# Altium PCB ES_Class6C_2L.PcbDoc
Units mm, origin at the board's own origin, x right, y up, seen from the top; angles counter-clockwise.
Board outline 56 x 55 mm, 2 copper layers (Top Layer, Bottom Layer), stack 1.586 mm thick; 71 components, 24 nets, 188 pads, 106 vias.
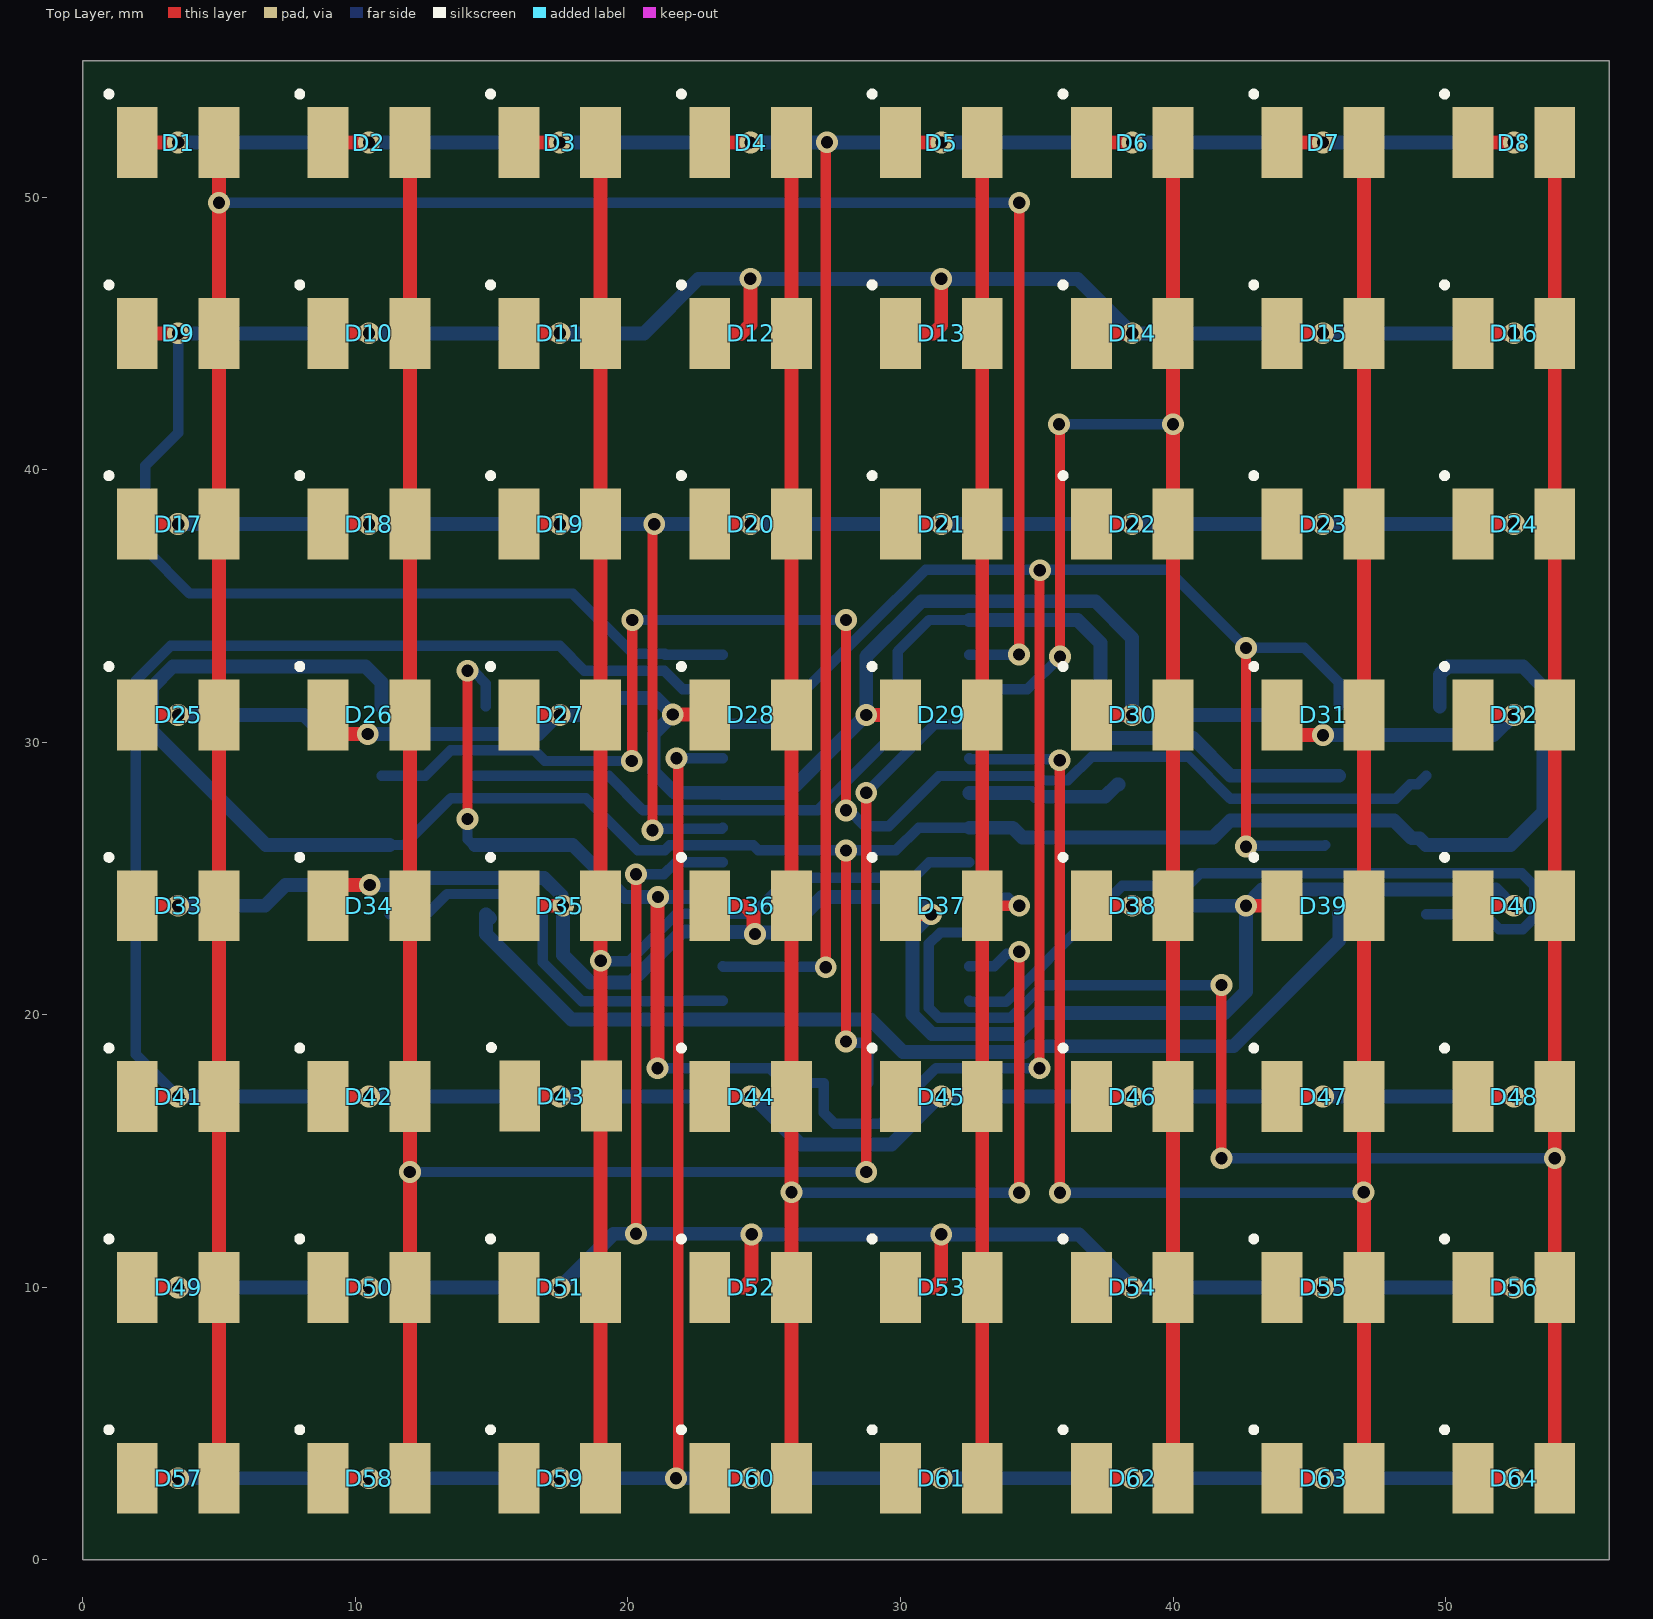
[diagram p0: Top Layer view]
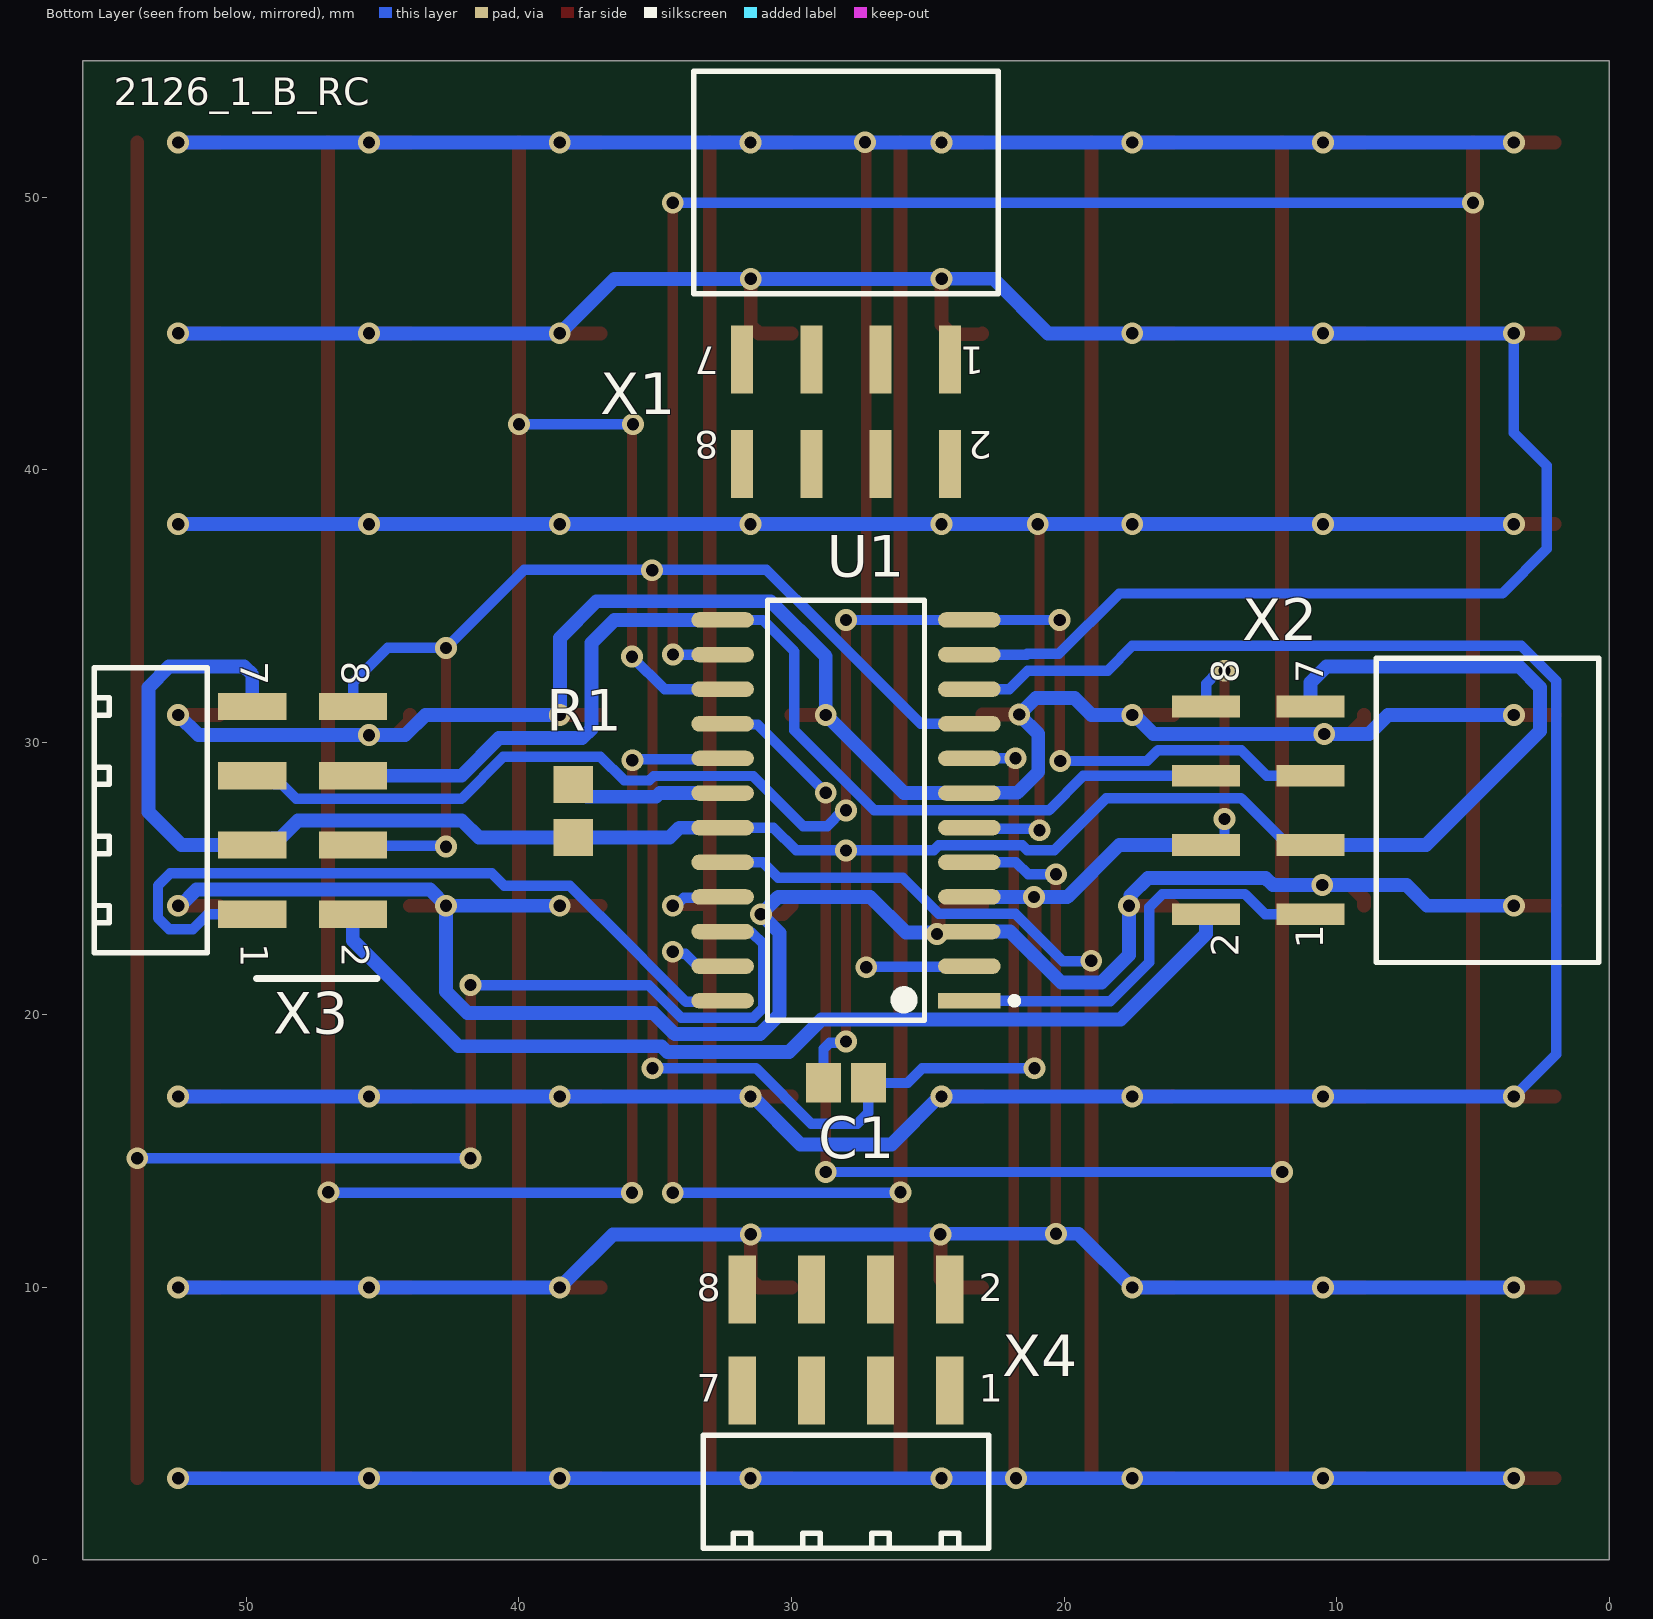
[diagram p1: Bottom Layer view, seen from below]
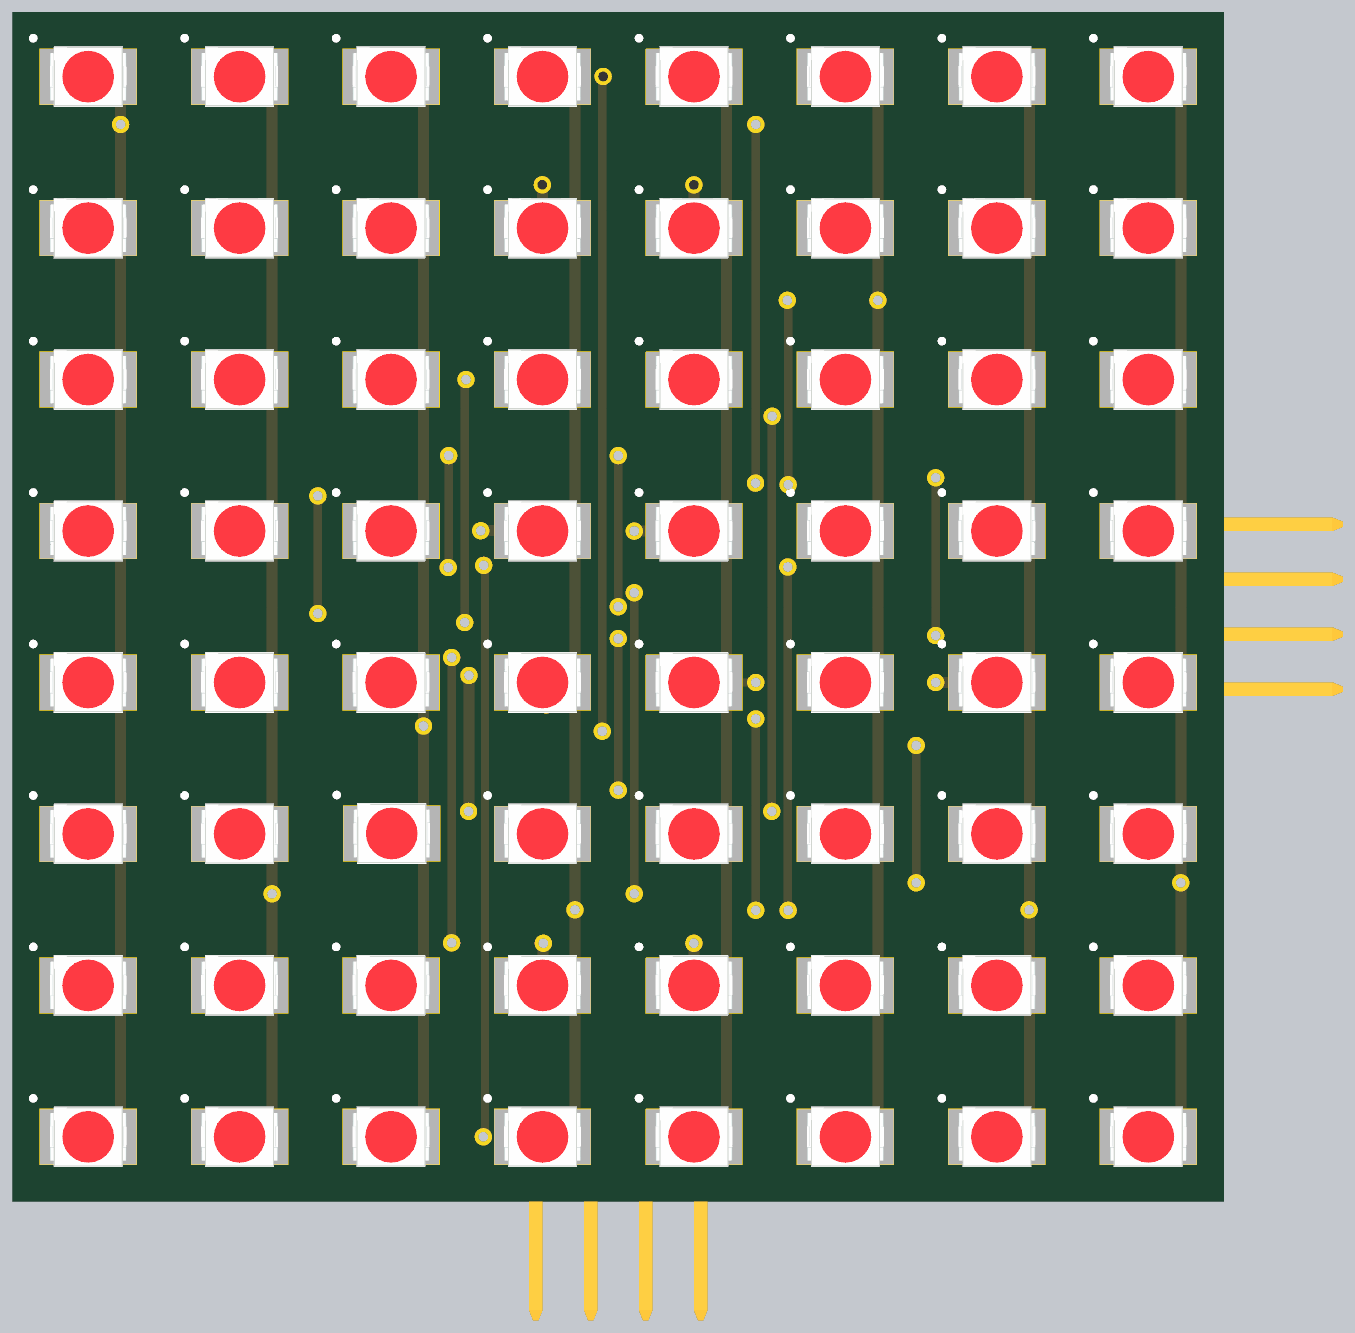
[diagram p2: 3D render of the assembled board from above, using the file's embedded part models]
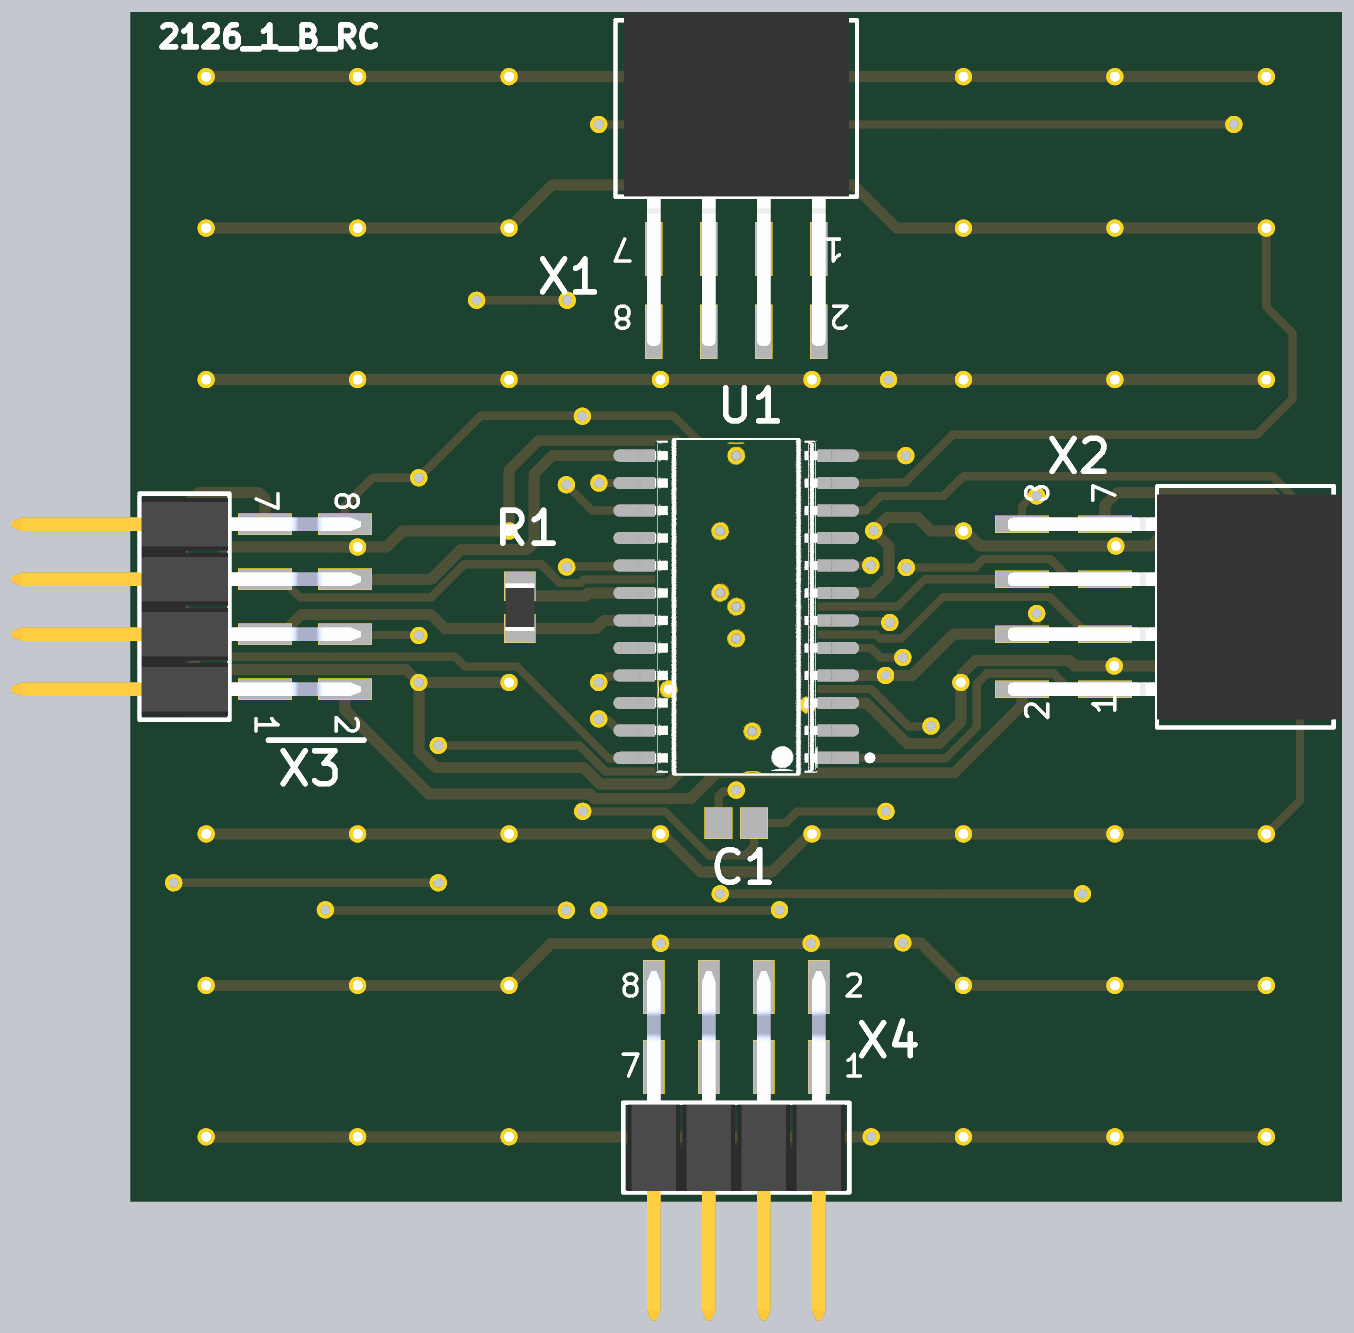
[diagram p3: 3D render of the assembled board from below, using the file's embedded part models]

## Layer stack, top to bottom
Top Solder: solder mask 0.0102, Solder Resist, Dk 3.5
Top Layer: signal copper 0.018
Dielectric1: core 1.55, FR-4, Dk 4.8
Bottom Layer: signal copper 0.018
Bottom Solder: solder mask 0.0102, Solder Resist, Dk 3.5

## Board outline
0,0 0,55 56,55 56,0

## Design rules (kind name [scope] priority, off if disabled: settings)
BoardOutlineClearance [All] p1: gap=0.25 ignorepadtopadclearanceinfootprint=FALSE except(0: Arc-SplitContinuation Track-SplitContinuation SMDPad-SplitContinuation THPad-SplitContinuation Via-SplitContinuation Fill-SplitContinuation Poly-SplitContinuation Region-SplitContinuation Text-SplitContinuation)
Clearance Clearance-xPP-xTP-xTT [All] p1: gap=0.15 ignorepadtopadclearanceinfootprint=FALSE except(0: Arc-Hole Track-Hole SMDPad-Hole THPad-Hole Via-Hole Fill-Hole Poly-Hole Region-Hole Text-Hole)
ComponentClearance [All] p1: gap=0.25 collisioncheckmode=3 verticalgap=0.25 showdistances=FALSE
DiffPairsRouting [All] p1: maxlimit=0.25 minlimit=0.25 mostfreqgap=0.25 toplayer_minwidth=0.381 toplayer_maxwidth=0.381 toplayer_prefwidth=0.381 bottomlayer_minwidth=0.381 bottomlayer_maxwidth=0.381 bottomlayer_prefwidth=0.381 maxuncoupledlength=12.5
Height [All] p1: minheight=0 maxheight=25 prefheight=12.5
HoleSize HoleSize-PTH [All] p1: absolutevalues=TRUE maxlimit=10 minlimit=0.25 maxpercent=80.000 minpercent=20.000
HoleToHoleClearance [All] p1: gap=0.35 allowstackedmicrovias=TRUE
MinimumAnnularRing "Minimum IAR  >0.45mm" [((ObjectKind = 'Pad') OR (ObjectKind = 'Via')) And (Layer = 'MultiLayer') And (HoleDiameter > AsMM(0.45))] p1: minimumring=0.175 // minimum inner annular ring for pads > 0.45mm finished hole size
MinimumAnnularRing "Minimum IAR <=0.45mm" [((ObjectKind = 'Pad') OR (ObjectKind = 'Via')) And (Layer = 'MultiLayer') And (HoleDiameter <= AsMM(0.45))] p2: minimumring=0.175 // minimum inner annular ring for pads <= 0.45mm finished hole size
MinimumSolderMaskSliver [All] p1: minsoldermaskwidth=0.08
PasteMaskExpansion [All] p1: expansion=-0.025
PlaneClearance PlaneClearance-IPI [All] p1: clearance=0.25
PlaneConnect [All] p1: planeconnectstyle=Relief reliefexpansion=0.175 reliefentries=4 reliefconductorwidth=0.2 reliefairgap=0.2
PolygonConnect PolygonConnect-xTW [All] p1: connectstyle=Relief reliefconductorwidth=0.2 reliefentries=4 polygonreliefangle="90 Angle" airgapwidth=0.2
RoomDefinition 2126_A_MatrixBoard_AffichageMatricielNomEtudiant [InComponentClass('2126_A_MatrixBoard_AffichageMatricielNomEtudiant')] p1: confinementstyle=ConfineIn formatcopy=TRUE lockcomponents=FALSE outline -250,-211.955 743.585,-211.955 743.585,443.238 -250,443.238
RoutingCorners [All] p1: cornerstyle=45-Degree minsetback=2.5 maxsetback=2.5
RoutingVias RoutingViasES [All] p1: holewidth=0.3 width=0.65 viastyle="Through Hole" minholewidth=0.25 minwidth=0.61 maxholewidth=0.45 maxwidth=0.8 // finishet hole size <= 0.45mm
SilkToSilkClearance [All] p1: silktosilkclearance=0.2
SilkToSolderMaskClearance SilkscreenOverComponentPads [IsPad] p1: minsilkscreentomaskgap=0.2 clearancetoexposedcopper=TRUE
SolderMaskExpansion [All] p1: expansion=0 istentingtop=FALSE
UnRoutedNet [All] p1: checkbadconnections=TRUE
Width Width-xTW [All] p1: maxlimit=0.508 minlimit=0.254 preferedwidth=0.381 minimp=50.000000 maximp=50.000000 favimp=50.000000
17 further rules are at their usual default settings.

## Components (designator, comment, footprint, x,y, rotation, side; value= is the part's Value field where it differs from the comment)
C1 "100nF" CAPC2013X145X48NL20T23 28,17.5 r0 bottom
D1 "RED" SODFL350X210-2N 3.5,52 r0 top
D2 "RED" SODFL350X210-2N 10.5,52 r0 top
D3 "RED" SODFL350X210-2N 17.5,52 r0 top
D4 "RED" SODFL350X210-2N 24.5,52 r0 top
D5 "RED" SODFL350X210-2N 31.5,52 r0 top
D6 "RED" SODFL350X210-2N 38.5,52 r0 top
D7 "RED" SODFL350X210-2N 45.5,52 r0 top
D8 "RED" SODFL350X210-2N 52.5,52 r0 top
D9 "RED" SODFL350X210-2N 3.5,45 r0 top
D10 "RED" SODFL350X210-2N 10.5,45 r0 top
D11 "RED" SODFL350X210-2N 17.5,45 r0 top
D12 "RED" SODFL350X210-2N 24.5,45 r0 top
D13 "RED" SODFL350X210-2N 31.5,45 r0 top
D14 "RED" SODFL350X210-2N 38.5,45 r0 top
D15 "RED" SODFL350X210-2N 45.5,45 r0 top
D16 "RED" SODFL350X210-2N 52.5,45 r0 top
D17 "RED" SODFL350X210-2N 3.5,38 r0 top
D18 "RED" SODFL350X210-2N 10.5,38 r0 top
D19 "RED" SODFL350X210-2N 17.5,38 r0 top
D20 "RED" SODFL350X210-2N 24.5,38 r0 top
D21 "RED" SODFL350X210-2N 31.5,38 r0 top
D22 "RED" SODFL350X210-2N 38.5,38 r0 top
D23 "RED" SODFL350X210-2N 45.5,38 r0 top
D24 "RED" SODFL350X210-2N 52.5,38 r0 top
D25 "RED" SODFL350X210-2N 3.5,31 r0 top
D26 "RED" SODFL350X210-2N 10.5,31 r0 top
D27 "RED" SODFL350X210-2N 17.5,31 r0 top
D28 "RED" SODFL350X210-2N 24.5,31 r0 top
D29 "RED" SODFL350X210-2N 31.5,31 r0 top
D30 "RED" SODFL350X210-2N 38.5,31 r0 top
D31 "RED" SODFL350X210-2N 45.5,31 r0 top
D32 "RED" SODFL350X210-2N 52.5,31 r0 top
D33 "RED" SODFL350X210-2N 3.5,24 r0 top
D34 "RED" SODFL350X210-2N 10.5,24 r0 top
D35 "RED" SODFL350X210-2N 17.5,24 r0 top
D36 "RED" SODFL350X210-2N 24.5,24 r0 top
D37 "RED" SODFL350X210-2N 31.5,24 r0 top
D38 "RED" SODFL350X210-2N 38.5,24 r0 top
D39 "RED" SODFL350X210-2N 45.5,24 r0 top
D40 "RED" SODFL350X210-2N 52.5,24 r0 top
D41 "RED" SODFL350X210-2N 3.5,17 r0 top
D42 "RED" SODFL350X210-2N 10.5,17 r0 top
D43 "RED" SODFL350X210-2N 17.53,17.021 r0 top
D44 "RED" SODFL350X210-2N 24.5,17 r0 top
D45 "RED" SODFL350X210-2N 31.5,17 r0 top
D46 "RED" SODFL350X210-2N 38.5,17 r0 top
D47 "RED" SODFL350X210-2N 45.5,17 r0 top
D48 "RED" SODFL350X210-2N 52.5,17 r0 top
D49 "RED" SODFL350X210-2N 3.5,10 r0 top
D50 "RED" SODFL350X210-2N 10.5,10 r0 top
D51 "RED" SODFL350X210-2N 17.5,10 r0 top
D52 "RED" SODFL350X210-2N 24.5,10 r0 top
D53 "RED" SODFL350X210-2N 31.5,10 r0 top
D54 "RED" SODFL350X210-2N 38.5,10 r0 top
D55 "RED" SODFL350X210-2N 45.5,10 r0 top
D56 "RED" SODFL350X210-2N 52.5,10 r0 top
D57 "RED" SODFL350X210-2N 3.5,3 r0 top
D58 "RED" SODFL350X210-2N 10.5,3 r0 top
D59 "RED" SODFL350X210-2N 17.5,3 r0 top
D60 "RED" SODFL350X210-2N 24.5,3 r0 top
D61 "RED" SODFL350X210-2N 31.5,3 r0 top
D62 "RED" SODFL350X210-2N 38.5,3 r0 top
D63 "RED" SODFL350X210-2N 45.5,3 r0 top
D64 "RED" SODFL350X210-2N 52.5,3 r0 top
R1 "43k" RESC2013X70X40ML20T20 38,27.475 r90 bottom value=10k
U1 "MAX7221CWG+" FP-W24-1-IPC_B 28,27.5 r0 bottom
X1 "610108249221" 610108249221 28,50.8 r0 bottom
X2 "610108249221" 610108249221 4.2,27.5 r90 bottom
X3 "M20-7920442R" 610108249121 53.5,27.5 r270 bottom
X4 "M20-7920442R" 610108249121 28,2.5 r180 bottom

## Footprints (in the part's own frame and the unit in brackets; to place one, negate y for a bottom-side part, rotate by r counter-clockwise, add the part's x,y. Pads: shape width x height; smd on the part's side, far side on the other; paste and mask are expansions set on the pad)
610108249121 [mm] "Pin Header, pitch 2.54 mm, SMD, Angled, dual row, 8p"
  rect 1x2.5 smd: 1(3.81,3.72) 2(3.81,7.42) 3(1.27,3.72) 4(1.27,7.42) 5(-1.27,3.72) 6(-1.27,7.42) 7(-3.81,3.72) 8(-3.81,7.42)
  silkscreen extent -5.23,-2.07 5.23,2.07, body extent -5.08,-8 5.08,8.16, height 5.1
610108249221 [mm] "Socket Header, Pitch 2.54 mm, SMT, Angled, dual row, 8p"
  rect 0.8x2.5 smd: 1(-3.81,6.76) 2(-3.81,10.59) 3(-1.27,6.76) 4(-1.27,10.59) 5(1.27,6.76) 6(1.27,10.59) 7(3.81,6.76) 8(3.81,10.59)
  silkscreen extent -5.58,-3.81 5.58,4.35, body extent -5.22,-4.15 5.2,11.25, height 5.03
CAPC2013X145X48NL20T23 [mm] "Chip Capacitor, 2-Leads, Body 2.00x1.25mm, IPC Medium Density"
  rect 1.3x1.45 smd: 1(-0.825,0) 2(0.825,0)
  body extent -1.1,-0.72 1.1,0.72, height 1.45
FP-W24-1-IPC_B [mm]
  rect 2.298x0.567 smd paste+0 mask+0: 1(-4.528,6.985)
  rrect100% 2.298x0.567 smd paste+0 mask+0: 2(-4.528,5.715) 3(-4.528,4.445) 4(-4.528,3.175) 5(-4.528,1.905) 6(-4.528,0.635) 7(-4.528,-0.635) 8(-4.528,-1.905) 9(-4.528,-3.175) 10(-4.528,-4.445) 11(-4.528,-5.715) 12(-4.528,-6.985) 13(4.528,-6.985) 14(4.528,-5.715) 15(4.528,-4.445) 16(4.528,-3.175) 17(4.528,-1.905) 18(4.528,-0.635) 19(4.528,0.635) 20(4.528,1.905) 21(4.528,3.175) 22(4.528,4.445) 23(4.528,5.715) 24(4.528,6.985)
  silkscreen extent -6.3,-7.7 2.88,7.7, body extent -5.16,-7.7 5.16,7.7, height 2.66
RESC2013X70X40ML20T20 [mm] "Chip Resistor, 2-Leads, Body 2.2x1.35mm, IPC Low Density"
  rect 1.35x1.45 smd: 1(-0.975,0) 2(0.975,0)
  body extent -1.1,-0.68 1.1,0.67, height 0.7
SODFL350X210-2N [mm] "SODFL, 2-Leads, Body 3,00x3,50mm, IPC Medium Density"
  rect 1.5x2.6 smd: A(1.5,0) K(-1.5,0)
  silkscreen extent -2.64,1.68 -2.44,1.88, body extent -1.78,-1.4 1.78,1.4, height 1.8

## Part data
C1: library part CMP-2007-03167-1, "VJ0805Y104KNAAT", Manufacturer=Vitramon, Manufacturer 1="Vishay Vitramon", Manufacturer Part Number 1=VJ0805Y104KNAAT, Part Number=VJ0805Y104KNAAT
D1 D2 D3 D4 D5 D6 D7 D8 D9 D10 D11 D12 D13 D14 D15 D16 D17 D18 D19 D20 D21 D22 D23 D24 D25 D26 D27 D28 D29 D30 D31 D32 D33 D34 D35 D36 D37 D38 D39 D40 D41 D42 D43 D44 D45 D46 D47 D48 D49 D50 D51 D52 D53 D54 D55 D56 D57 D58 D59 D60 D61 D62 D63 D64: library part 151031VS04000, "WL-TMRC THT Mono-color Round Color, size 3mm, Bright Green, 2.1V, 40deg", Emitting Color="Bright Green", Forward Voltage=2.1V, Operating Temperature="-40 to +85degC", Chip Technology=AlInGaP, ComponentLink1Description=Manufacturer, ComponentLink1URL=http://www.we-online.de, ComponentLink2Description=Datasheet, ComponentLink2URL=https://katalog.we-online.de/led/datasheet/151031VS04000.pdf, Dominant Wavelength=570nm, Luminous Intensity=120mcd, Mounting Technology=THT, Packaging=Bulk, Part Number=151031VS04000, Peak Wavelength=573nm, Published Date="January 2021", Publisher="Wurth Elektronik", Size=3mm, Viewing Angle=40deg
R1: library part CMP-1013-00623-1, "10K 0.125W 1% 0805 (2012 Metric)  SMD", Case-EIA=0805, Case-Metric=2012, Manufacturer 1="Vishay Dale", Manufacturer 2=Yageo, Manufacturer 5=Bourns, Manufacturer 6=Rohm, Manufacturer 7=Vishay, Manufacturer 10=Panasonic, Manufacturer Part Number 1=CRCW080510K0FKEC, Manufacturer Part Number 2=RC0805FR-0710KL, Manufacturer Part Number 3=CRCW080510K0FKTC, Manufacturer Part Number 4=CRCW080510K0FKEB, Manufacturer Part Number 5=CR0805-FX-1002ELF, Manufacturer Part Number 6=MCR10EZPF1002, Manufacturer Part Number 7=CRCW080510K0FKEA, Manufacturer Part Number 8=CRCW080510K0FKTB, Manufacturer Part Number 9=CRCW080510K0FKTA, Manufacturer Part Number 10=ERJ-6ENF1002V, Power="0.125 W", Supplier Part Number 1=541-10.0KCCT-ND, Tolerance="1 %", Manufacturer 3="Vishay Dale", Manufacturer 4="Vishay Dale", Manufacturer 8="Vishay Dale", Manufacturer 9="Vishay Dale", Supplier 1=Digi-Key, Technology=SMT
U1: library part CMP-05718-000002-1, "IC DRVR 7 SEGMNT 8 DIGIT 24SOIC", Manufacturer="Maxim Integrated", Max Junction Temp=+150°C, Max Power Dissipation=941mW, Max Supply Voltage=5.5V, Min Supply Voltage=4V, Nominal Supply Current=330mA, Package=W24-1, Temperature="0°C to +70°C", Temperature Range High=+70°C, Temperature Range Low=0°C, Automotive=No, Category=IC, ComponentLink2Description=Datasheet, ComponentLink2URL=https://datasheets.maximintegrated.com/en/ds/MAX7219-MAX7221.pdf, Device Class L1="Integrated Circuits (ICs)", Device Class L2="Power Management ICs", Device Class L3="LED Drivers", Digikey Description="IC DRVR 7 SEGMNT 8 DIGIT 24SOIC", Footprint Url=https://pdfserv.maximintegrated.com/land_patterns/90-0182.PDF, Height=2.65mm, Ipc Land Pattern Name=SOIC127P1032X250-24, Lead Free=Yes, Manufacturer Part Number=MAX7221CWG+, Mouser Description="In a Tube of 30, Maxim MAX7221CWG+, LED Driver, 8-Digits 64-Segments, 5 V, 24-Pin SOIC W", Number Of Outputs=8, Octopart=https://octopart.com/max7221cwg%2B-maxim+integrated-39581478, RoHS=TRUE, Standoff Height=0.1mm
X1 X2: "WR-PHD Socket Header, THT, pitch 2.54mm, Dual Row, Angled, 8p", Contact Resistance=20mOhm, Manufacturer="Wurth Elektronik", Manufacturer Part Number=613008243121, Operating Temperature="-40 to +125degC", Rated Current=3A, Withstanding Voltage=500VAC, Working Voltage=250VAC, ComponentLink1Description=Manufacturer, ComponentLink1URL=http://www.we-online.de, ComponentLink2Description=Datasheet, ComponentLink2URL=https://www.we-online.com/catalog/datasheet/613008243121.pdf, Gender="Socket Header", Mounting Technology=THT, Orientation=Angled, Packaging=Tray, Pin Number=8, Pitch=2.54mm, Row Number=Dual
X3 X4: library part 610108249121, "WR-PHD Pin Header, THT, pitch 2.54mm, Dual Row, Angled, 8p", Contact Resistance=20mOhm, Manufacturer="Wurth Elektronik", Manufacturer Part Number=61300821021, Operating Temperature="-40 to +105degC", Rated Current=3A, Withstanding Voltage=500VAC, Working Voltage=250VAC, ComponentLink1Description=Manufacturer, ComponentLink1URL=http://www.we-online.de, ComponentLink2Description=Datasheet, ComponentLink2URL=https://www.we-online.com/catalog/datasheet/61300821021.pdf, Gender="Pin Header", Mounting Technology=THT, Orientation=Angled, Packaging=Bag, Pin Number=8, Pitch=2.54mm, Row Number=Dual

## Via types
v1: diameter 0.8, hole 0.45, Top Layer to Bottom Layer, 106 vias

## Nets (pads, with @x,y where several pads share a name; then routed paths per layer and width w, separated by ;. In a path a pad name is that pad's centre, name@x,y a point inside that pad or via, vN(x,y) a via of type N, cw(c..) or ccw(c..) an arc to the next point about the centre after c; other vN are vias at no path point)
+5: C1.2 R1.1 U1.19 X2.3 X2.7 X3.3 X3.7 | length 86.7
  Top Layer w0.381: v1(28,19.024) v1(28,26.03)
  Bottom Layer w0.381: X2.3@11.26,26.23 11.81,26.23 12.02,26.44 12.02,26.46 13.508,27.948 18.449,27.948 20.367,26.03 21.347,26.03 21.536,26.219 24.596,26.219 24.785,26.03 v1(28,26.03) 29.832,26.03 30.667,26.865 U1.19 ; v1(28,19.024) 28.046,18.978 28.602,18.978 28.825,18.755 C1.2
  Bottom Layer w0.508: X2.7 10.96,32.193 10.379,32.774 3.302,32.774 2.54,32.012 2.54,30.408 6.718,26.23 X2.3@11.26,26.23 ; U1.19 34.103,26.865 34.468,26.5 R1.1 41.462,26.5 42.096,27.134 48.105,27.134 48.763,26.476 49.034,26.476 49.28,26.23 52.384,26.23 53.594,27.44 53.594,32.012 52.832,32.774 50.078,32.774 49.78,32.476 X3.7
/SS1: U1.12 X2.5 X3.5 | length 53.4
  Top Layer w0.381: v1(20.141,29.313) 20.163,29.335 v1(20.163,34.485) ; v1(28,27.5) v1(28,34.485)
  Bottom Layer w0.381: X2.5 12.558,28.77 13.5,29.711 16.556,29.711 16.954,29.313 v1(20.141,29.313) ; v1(20.163,34.485) U1.12 v1(28,34.485) ; v1(28,27.5) 28.113,27.5 28.694,26.919 29.564,26.919 31.404,28.759 35.05,28.759 35.213,28.596 36.144,28.596 37.013,29.465 40.568,29.465 42.104,27.929 48.168,27.929 48.699,28.46 48.97,28.46 X3.5@49.28,28.77
DIN: U1.1 X2.1 | length 15.3
  Bottom Layer w0.381: X2.1@11.26,23.69 12.621,23.69 13.362,24.43 16.401,24.43 16.88,23.951 16.88,21.928 18.313,20.495 21.753,20.495 21.773,20.515 U1.1
DOUT: U1.24 X3.1 | length 28.4
  Bottom Layer w0.381: U1.24 32.564,20.479 33.871,20.479 37.003,23.611 37.013,23.611 38.137,24.734 38.137,24.741 40.543,24.741 40.991,25.188 52.793,25.188 53.241,24.741 53.241,23.553 52.82,23.133 51.967,23.133 51.409,23.69 X3.1@49.28,23.69
GND: C1.1 U1.4 U1.9 X2.4 X2.8 X3.4 X3.8 | length 96.8
  Top Layer w0.381: v1(14.115,27.186) v1(14.115,32.624) ; v1(35.097,18.042) v1@35.097,36.291 ; v1(42.672,26.17) v1(42.672,33.46)
  Top Layer w0.508: v1(21.082,18.042) 21.091,18.051 21.091,24.316 v1(21.099,24.325)
  Bottom Layer w0.381: v1(14.115,27.186) 14.115,26.44 14.324,26.23 X2.4@14.39,26.23 ; v1(14.115,32.624) 14.195,32.544 14.4,32.544 14.79,32.154 X2.8 ; v1(21.082,18.042) 25.196,18.042 25.738,17.5 C1.1 27.183,17.492 27.183,16.407 27.58,16.01 29.269,16.01 31.301,18.042 v1(35.097,18.042) ; U1.9 25.265,30.675 28.819,34.229 30.92,36.33 35.087,36.33 v1(35.111,36.305) 35.136,36.33 39.802,36.33 v1(42.672,33.46) 44.814,33.46 46.08,32.194 X3.8 ; v1(42.672,26.17) 42.702,26.2 45.55,26.2 X3.4@45.58,26.23
  Bottom Layer w0.508: X2.4@14.39,26.23 15.29,26.23 17.976,26.23 19.881,24.325 v1(21.099,24.325) U1.4
LINE0: D1.K D2.K D3.K D4.K D5.K D6.K D7.K D8.K U1.2 | length 95.1
  Top Layer w0.381: v1(27.259,21.745) 27.259,51.97 v1(27.3,52.011)
  Top Layer w0.508: D1.K v1(3.5,52) ; D2.K v1(10.5,52) ; D3.K v1(17.5,52) ; D4.K v1(24.5,52) ; D5.K v1(31.5,52) ; D6.K v1(38.5,52) ; D7.K v1(45.5,52) ; D8.K v1(52.5,52)
  Bottom Layer w0.381: U1.2 23.492,21.765 27.239,21.765 v1(27.259,21.745)
  Bottom Layer w0.508: v1(3.5,52) v1(10.5,52) v1(17.5,52) v1(24.5,52) v1(31.5,52) v1(38.5,52) v1(45.5,52) v1(52.5,52)
LINE1: D9.K D10.K D11.K D12.K D13.K D14.K D15.K D16.K U1.11 | length 97.5
  Top Layer w0.508: D9.K v1(3.5,45) ; D10.K v1(10.5,45) ; D11.K v1(17.5,45) ; D12.K 23.034,44.966 24.13,44.966 24.491,45.327 v1(24.491,47.001) ; D13.K 31.198,45 31.496,45.298 v1(31.496,46.998) ; D14.K v1(38.5,45) ; D15.K v1(45.5,45) ; D16.K v1(52.5,45)
  Bottom Layer w0.381: v1(3.5,45) 3.5,41.354 2.286,40.14 2.286,37.092 3.924,35.454 17.984,35.454 20.199,33.239 21.348,33.239 21.372,33.215 U1.11
  Bottom Layer w0.508: v1(3.5,45) v1(10.5,45) v1(17.5,45) 20.586,45 22.587,47.001 v1(24.491,47.001) 24.493,47 31.494,47 v1(31.496,46.998) 36.502,46.998 v1(38.5,45) v1(45.5,45) v1(52.5,45)
LINE2: D17.K D18.K D19.K D20.K D21.K D22.K D23.K D24.K U1.6 | length 74.9
  Top Layer w0.381: v1(20.903,26.771) 20.903,37.941 v1(20.962,38)
  Top Layer w0.508: D17.K v1(3.5,38) ; D18.K v1(10.5,38) ; D19.K v1(17.5,38) ; D20.K v1(24.5,38) ; D21.K v1(31.5,38) ; D22.K v1(38.5,38) ; D23.K v1(45.5,38) ; D24.K v1(52.5,38)
  Bottom Layer w0.381: v1(20.903,26.771) 20.962,26.829 23.436,26.829 U1.6
  Bottom Layer w0.508: v1(3.5,38) v1(10.5,38) v1(31.5,38) v1(38.5,38) v1(45.5,38) v1(52.5,38)
LINE3: D25.K D26.K D27.K D28.K D29.K D30.K D31.K D32.K U1.7 | length 73.9
  Top Layer w0.508: D25.K v1(3.5,31) ; D26.K 9,30.802 9.496,30.306 v1(10.456,30.306) ; D27.K v1(17.5,31) ; v1(21.645,31.013) 22.987,31.013 D28.K ; v1(28.74,30.996) 29.996,30.996 D29.K ; D30.K v1(38.5,31) ; D31.K 44,30.756 44.496,30.26 v1(45.5,30.26) ; D32.K v1(52.5,31)
  Bottom Layer w0.508: v1(3.5,31) 8.124,31 8.818,30.306 v1(10.456,30.306) 16.727,30.306 17.421,31 v1(17.5,31) 18.989,31 19.61,31.621 21.038,31.621 v1(21.645,31.013) 21.645,30.997 20.945,30.296 20.945,28.917 21.716,28.145 23.462,28.145 U1.7 25.879,28.135 v1(28.74,30.996) ; v1@28.74,31.034 28.74,33.14 30.773,35.172 37.147,35.172 38.492,33.827 38.492,31.008 v1(38.5,31) 43.43,31 44.17,30.26 v1(45.5,30.26) ; v1@45.635,30.26 51.76,30.26 v1(52.5,31)
LINE4: D33.K D34.K D35.K D36.K D37.K D38.K D39.K D40.K U1.3 | length 80.3
  Top Layer w0.508: D33.K v1(3.5,24) ; D34.K 9,24.263 9.496,24.759 v1(10.529,24.759) ; D35.K v1(17.621,24) ; D36.K 24.268,24 24.609,23.659 24.609,23.02 v1(24.665,22.964) ; D37.K 30.31,23.69 v1(31.123,23.69) ; D38.K v1(38.5,24) ; v1(42.672,24) D39.K ; D40.K v1(52.5,24)
  Bottom Layer w0.508: v1(3.5,24) 6.68,24 7.439,24.759 v1(10.529,24.759) 12.339,24.759 12.604,25.025 16.927,25.025 17.565,24.387 v1@17.565,24.079 ; v1(17.621,24) 17.621,22.194 18.633,21.182 20.104,21.182 21.977,23.055 U1.3 ; U1.3@23.475,23.052 23.483,23.044 24.506,23.044 24.586,22.964 v1(24.665,22.964) ; v1@24.694,23.02 25.806,23.02 27.111,24.325 30.488,24.325 v1(31.123,23.69) 30.444,23.011 30.444,20.01 31.158,19.297 34.284,19.297 35.058,20.07 41.889,20.07 42.672,20.854 v1(42.672,24) ; v1(38.5,24) v1(42.672,24) ; v1(52.5,24) 52.421,24 51.827,24.594 43.266,24.594 v1(42.672,24)
LINE5: D41.K D42.K D43.K D44.K D45.K D46.K D47.K D48.K U1.10 | length 101
  Top Layer w0.508: D41.K v1(3.5,17) ; D42.K v1(10.5,17) ; D43.K 16.051,17 v1(17.5,17) ; D44.K v1(24.5,17) ; D45.K v1(31.5,17) ; D46.K v1(38.5,17) ; D47.K v1(45.5,17) ; D48.K v1(52.5,17)
  Bottom Layer w0.381: v1(3.5,17) 1.945,18.554 1.945,32.258 3.223,33.536 17.493,33.536 18.405,32.624 21.332,32.624 22.011,31.945 U1.10
  Bottom Layer w0.508: v1(3.5,17) v1(10.5,17) v1(17.5,17) 24.579,17 26.331,15.248 29.669,15.248 31.421,17 v1(38.5,17) v1(45.5,17) v1(52.5,17)
LINE6: D49.K D50.K D51.K D52.K D53.K D54.K D55.K D56.K U1.5 | length 82.8
  Top Layer w0.381: v1(20.3,11.966) v1(20.3,25.154)
  Top Layer w0.508: D49.K v1(3.5,10) ; D50.K v1(10.5,10) ; D51.K v1(17.5,10) ; D52.K 24.235,10 24.533,10.298 24.533,11.961 v1@24.538,11.966 ; D53.K 31.198,10 31.496,10.298 v1(31.496,11.946) ; D54.K v1(38.5,10) ; D55.K v1(45.5,10) ; D56.K v1(52.5,10)
  Bottom Layer w0.381: v1(20.3,25.154) 21.323,25.154 21.764,25.595 U1.5
  Bottom Layer w0.508: v1(3.5,10) v1(10.5,10) v1(17.5,10) 19.466,11.966 v1(20.3,11.966) v1@24.538,11.966 ; v1(24.538,11.946) v1(31.496,11.946) 36.554,11.946 v1(38.5,10) v1(45.5,10) v1(52.5,10)
LINE7: D57.K D58.K D59.K D60.K D61.K D62.K D63.K D64.K U1.8 | length 89.2
  Top Layer w0.381: v1(21.764,3) 21.844,3.08 21.844,29.35 v1(21.781,29.413)
  Top Layer w0.508: D57.K v1(3.5,3) ; D58.K v1(10.5,3) ; D59.K v1(17.5,3) ; D60.K v1(24.5,3) ; D61.K v1(31.5,3) ; D62.K v1(38.5,3) ; D63.K v1(45.5,3) ; D64.K v1(52.5,3)
  Bottom Layer w0.381: v1(21.781,29.413) 21.785,29.409 23.468,29.409 U1.8
  Bottom Layer w0.508: v1(3.5,3) v1(10.5,3) v1(17.5,3) v1(21.764,3) v1(24.5,3) v1(31.5,3) v1(38.5,3) v1(45.5,3) v1(52.5,3)
MISO: X2.2 X3.2 | length 36.7
  Bottom Layer w0.508: X2.2@14.942,23.544 14.796,23.69 X2.2 14.79,22.964 17.926,19.828 28.899,19.828 30.088,18.639 34.557,18.639 34.764,18.846 42.213,18.846 46.093,22.726 46.093,23.677 X3.2
NetR1_2: R1.2 U1.18 | length 5.7
  Bottom Layer w0.508: U1.18 34.833,28.135 34.966,28.002 37.502,28.002 37.95,28.45 R1.2
ROW0: D1.A D9.A D17.A D25.A D33.A D41.A D49.A D57.A U1.14 | length 96.8
  Top Layer w0.381: v1(34.346,33.215) 34.352,33.22 34.352,49.787 v1(34.357,49.792)
  Top Layer w0.508: D57.A D49.A D41.A D33.A D25.A D17.A D9.A v1(5,49.792) D1.A
  Bottom Layer w0.381: v1(5,49.792) v1(34.357,49.792) ; U1.14 v1(34.346,33.215)
ROW1: D2.A D10.A D18.A D26.A D34.A D42.A D50.A D58.A U1.16 | length 84.5
  Top Layer w0.381: v1(28.74,14.232) v1(28.74,28.146)
  Top Layer w0.508: D58.A D50.A v1(12,14.232) D42.A D34.A D26.A D18.A D10.A D2.A
  Bottom Layer w0.381: v1(12,14.232) v1(28.74,14.232) ; v1(28.74,28.146) 31.242,30.648 32.501,30.648 U1.16
ROW2: D3.A D11.A D19.A D27.A D35.A D43.A D51.A D59.A U1.20 | length 64
  Top Layer w0.508: D59.A D51.A v1(19,21.986) D35.A D27.A D19.A D11.A D3.A
  Bottom Layer w0.381: v1(19,21.986) 19.023,21.963 20.044,21.963 21.782,23.701 24.596,23.701 25.92,25.025 30.48,25.025 31.05,25.595 U1.20
ROW3: D4.A D12.A D20.A D28.A D36.A D44.A D52.A D60.A U1.23 | length 68.3
  Top Layer w0.381: 34.356,16.796 34.356,19.928 ; v1(34.357,13.47) 34.357,16.795 ; 34.357,19.929 v1@34.357,22.314
  Top Layer w0.508: D60.A D52.A v1(26,13.491) D44.A D36.A D20.A D12.A D4.A
  Bottom Layer w0.381: v1(26,13.491) 26.021,13.47 v1(34.357,13.47) ; U1.23 33.444,21.785 33.894,22.235 34.276,22.235 v1(34.356,22.315)
ROW4: D5.A D13.A D21.A D29.A D37.A D45.A D53.A D61.A U1.21 | length 52.3
  Top Layer w0.381: D37.A v1(34.356,24)
  Top Layer w0.508: D61.A D53.A D45.A D37.A D29.A D21.A D13.A D5.A
  Bottom Layer w0.381: U1.21 32.564,24.289 33.954,24.289 34.244,24 v1(34.356,24)
ROW5: D6.A D14.A D22.A D30.A D38.A D46.A D54.A D62.A U1.15 | length 65.5
  Top Layer w0.381: v1(35.814,41.664) 35.852,41.626 v1(35.852,33.14)
  Top Layer w0.508: D62.A D54.A D46.A D38.A D30.A D22.A v1(40,41.664) D14.A D6.A
  Bottom Layer w0.381: U1.15 34.657,31.945 v1(35.852,33.14) ; v1(35.814,41.664) v1(40,41.664)
ROW6: D7.A D15.A D23.A D31.A D39.A D47.A D55.A D63.A U1.17 | length 79.3
  Top Layer w0.381: v1@35.837,13.485 v1(35.837,29.337)
  Top Layer w0.508: D63.A D55.A D47.A D39.A D31.A D23.A D15.A D7.A
  Bottom Layer w0.381: U1.17 32.562,29.371 35.803,29.371 v1(35.837,29.337) ; v1(35.852,13.47) 46.968,13.47 v1(46.99,13.491)
ROW7: D8.A D16.A D24.A D32.A D40.A D48.A D56.A D64.A U1.22 | length 83
  Top Layer w0.381: v1(41.771,14.74) v1(41.771,21.09)
  Top Layer w0.508: D64.A D56.A v1(54,14.74) D48.A D40.A D32.A D24.A D16.A D8.A
  Bottom Layer w0.381: U1.22 32.492,23.019 31.454,23.019 31.039,22.604 31.039,20.257 31.404,19.891 34.038,19.891 35.237,21.09 v1(41.771,21.09) ; v1(41.771,14.74) v1(54,14.74)
SCK1: U1.13 X2.6 X3.6 | length 41
  Bottom Layer w0.381: X2.6@14.39,28.77 15.29,28.77 19.293,28.77 20.552,27.511 26.964,27.511 29.896,30.443 29.896,33.329 31.052,34.485 U1.13
  Bottom Layer w0.508: U1.13 36.488,34.485 37.338,33.635 37.338,30.488 37.676,30.15 40.724,30.15 42.104,28.77 X3.6
pads on no net: X1.1 X1.2 X1.3 X1.4 X1.5 X1.6 X1.7 X1.8 X4.1 X4.2 X4.3 X4.4 X4.5 X4.6 X4.7 X4.8

## Silkscreen, mask and mechanical layers (free items; w line width, h text height)
Bottom Overlay:
  lines w0.254: 45.204,21.336 49.621,21.336
  text "2126_1_B_RC" at 54.856,53.365 h1.02
Board Outline (ES):
  the board outline again, w0.254

## Text inside footprints (layer, text, board x,y; h text height)
X1: Bottom Overlay "1" at 22.93,44.5 h1.02 r180; Bottom Overlay "2" at 22.63,41.4 h1.02 r180; Bottom Overlay "7" at 32.67,44.5 h1.02 r180; Bottom Overlay "8" at 32.67,41.4 h1.02 r180
X2: Bottom Overlay "8" at 13.6,32.17 h1.02 r270; Bottom Overlay "7" at 10.5,32.17 h1.02 r270; Bottom Overlay "2" at 13.6,22.13 h1.02 r270; Bottom Overlay "1" at 10.5,22.43 h1.02 r270
X3: Bottom Overlay "2" at 46.5,22.63 h1.02 r90; Bottom Overlay "1" at 50.2,22.63 h1.02 r90; Bottom Overlay "8" at 46.5,32.97 h1.02 r90; Bottom Overlay "7" at 50.2,32.97 h1.02 r90
X4: Bottom Overlay "7" at 33.47,5.8 h1.02; Bottom Overlay "8" at 33.47,9.5 h1.02; Bottom Overlay "1" at 23.13,5.8 h1.02; Bottom Overlay "2" at 23.13,9.5 h1.02